# Altium PCB Floyd-V2-PCB.PcbDoc
Units mil, origin at the board's own origin, x right, y up, seen from the top; angles counter-clockwise.
Board outline 3135 x 1771.65 mil, 2 copper layers (Top Layer, Bottom Layer); 25 components, 16 nets, 76 pads, 58 vias.
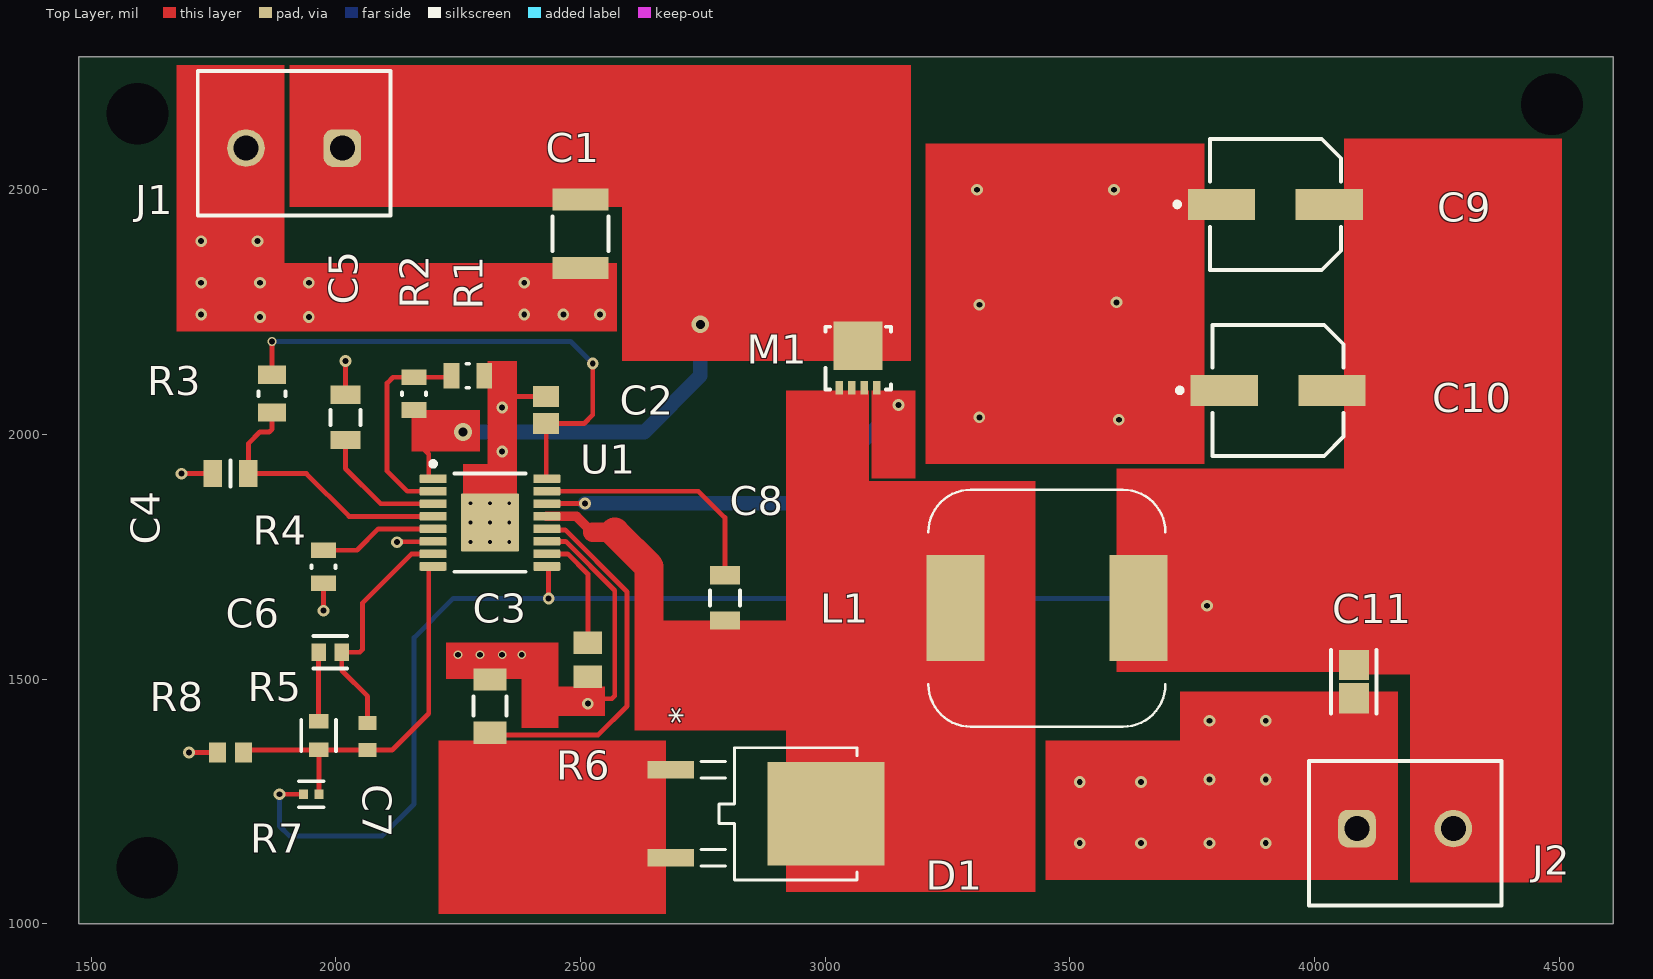
[diagram p0: Top Layer view]
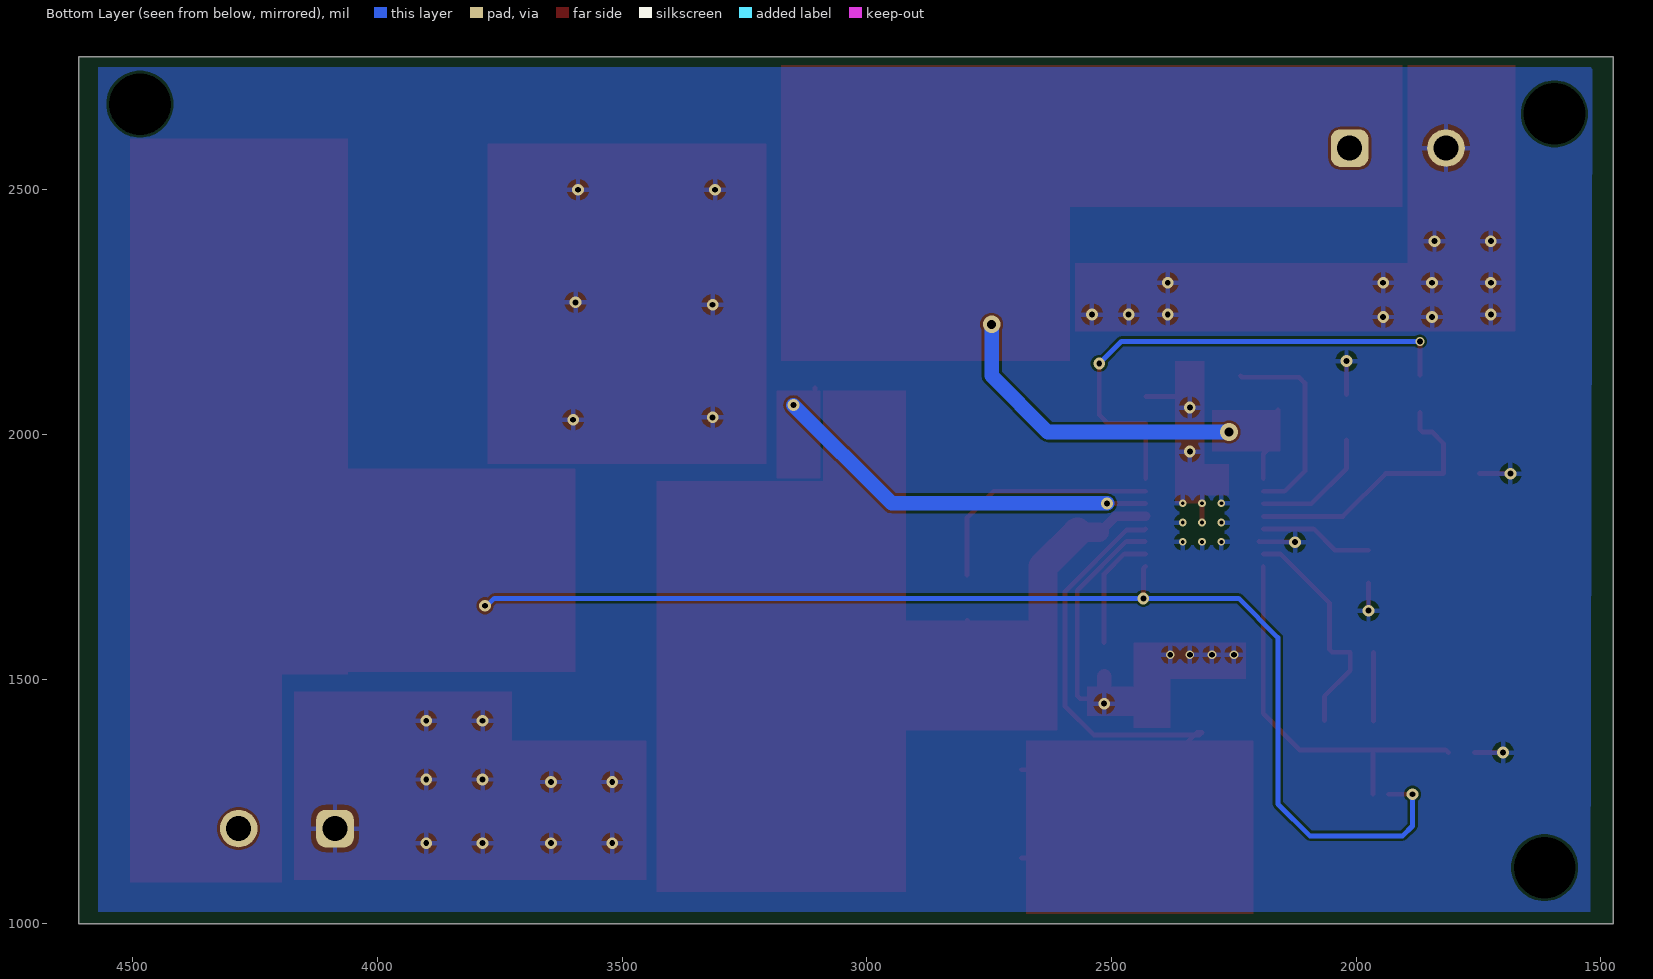
[diagram p1: Bottom Layer view, seen from below]
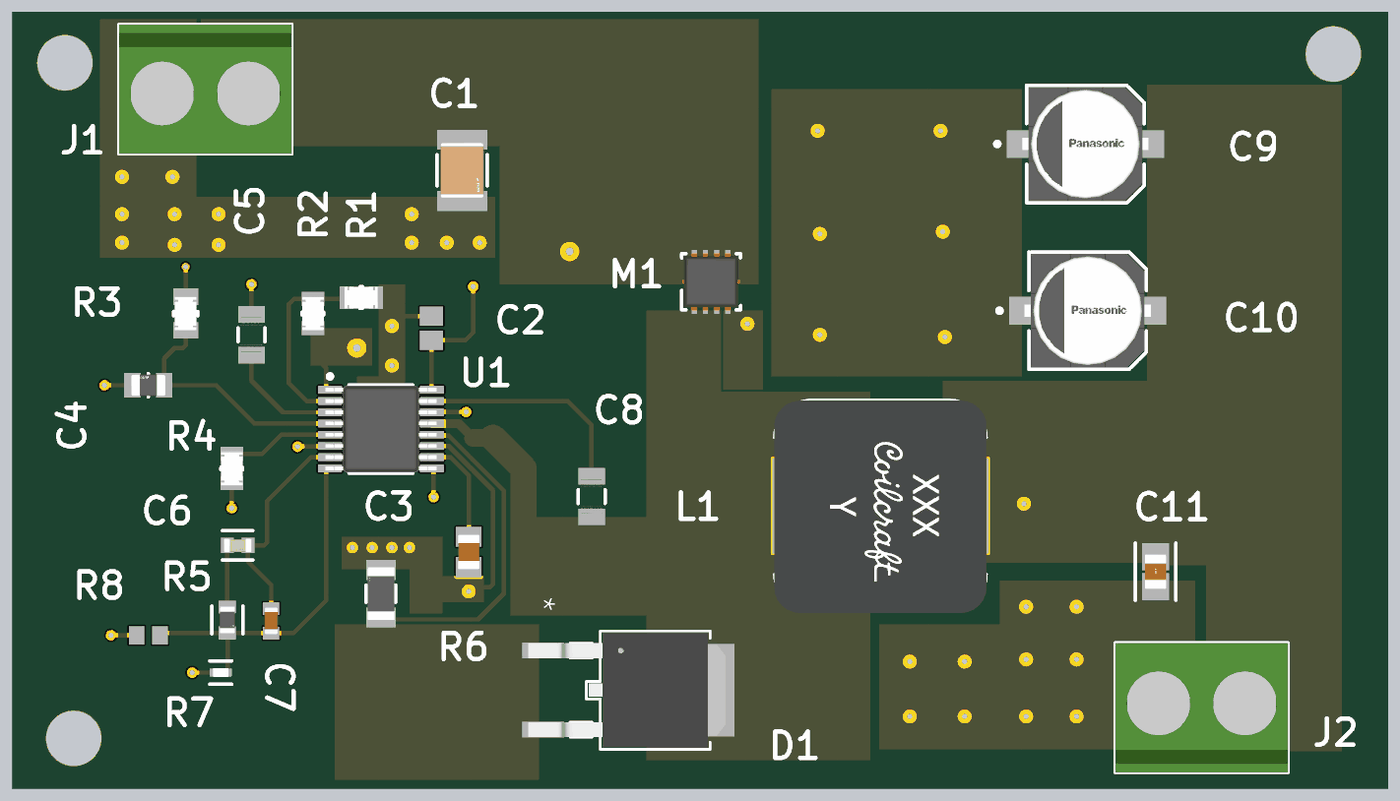
[diagram p2: 3D render of the assembled board from above, using the file's embedded part models]

## Layer stack, top to bottom
Top Solder: solder mask 0.4, Solder Resist, Dk 3.5
Top Layer: signal copper 1.4
Dielectric 1: dielectric 12.6, FR-4, Dk 4.8
Bottom Layer: signal copper 1.4
Bottom Solder: solder mask 0.4, Solder Resist, Dk 3.5

## Board outline
1475,1000 1475,2771.65 4610,2771.65 4610,1000

## Design rules (kind name [scope] priority, off if disabled: settings)
Clearance [All] p1: gap=5 ignorepadtopadclearanceinfootprint=FALSE
HoleSize [All] p1: absolutevalues=TRUE maxlimit=135 minlimit=1 maxpercent=80.000 minpercent=20.000
MinimumSolderMaskSliver [All] p1: minsoldermaskwidth=4
PolygonConnect [All] p1: connectstyle=Relief reliefconductorwidth=10 reliefentries=4 polygonreliefangle="90 Angle" airgapwidth=10
RoutingVias [All] p1: holewidth=28 width=50 viastyle="Through Hole" minholewidth=11.81 minwidth=23.62 maxholewidth=28 maxwidth=50
SilkToSolderMaskClearance [IsPad] p1: minsilkscreentomaskgap=4 clearancetoexposedcopper=TRUE
SolderMaskExpansion [All] p1: expansion=4 istentingtop=FALSE
SupplyNets "Schematic Supply Nets" [InNet('GND')] p1: voltage=0.000
Width [All] p1: maxlimit=200 minlimit=5 preferedwidth=10
27 further rules are at their usual default settings.

## Components (designator, comment, footprint, x,y, rotation, side; value= is the part's Value field where it differs from the comment)
C1 "C3225X7S2A335K200AB" FP-C3225-200-0_4-IPC_A 2500,2410 r270 top
C2 "08053C154KAT2A" CAPC2013X140X50LL20T25 2430,2050 r270 top
C3 "08053C104JAZ2A" CAPC2012X94N 2515,1540 r90 top
C4 "CC0805JRNPO9BN681" FP-CC0805-0_1-0_7-MFG 1785,1920 r180 top
C5 "CGA4C2C0G1H822J060AA" FP-CGA4J-IPC_A 2020,2035 r90 top
C6 "C0603C152K5RACTU" FP-C0603C-CF-MFG 1988.62,1555 r180 top value="1,500 pF"
C7 "CL10C220JB8NNNC" CAPC1608X90N 2065,1382.95 r270 top
C8 "CGA4C2C0G1H822J060AA" FP-CGA4J-IPC_A 2795,1666.26 r270 top
C9 "35SVPF22M" FP-OS-CON-SMT-C6-MFG 3920,2470 r0 top
C10 "35SVPF22M" FP-OS-CON-SMT-C6-MFG 3925.24,2090 r0 top
C11 "C2012X5R1E225K125AC" FP-C2012-125-0_2-IPC_A 4080,1495 r270 top
D1 "SBRD10200TR" DPAK_SBRD10200_6P6X6P1_SDS 2940,1225 r270 top
J1 "691137710002" 691137710002 1915,2595 r180 top
J2 "691137710002" 691137710002 4185,1185 r0 top
L1 "MSS1210-153MEB" IND_MSS1210-153MEB 3452.99,1645 r90 top
M1 "CSD18543Q3A" DNH0008A_NV 3067.2,2156.02 r90 top
R1 "CRCW08052K26FKEA" FP-CRCW0805-e3-IPC_C 2270,2120 r0 top
R2 "CRCW080549K9FKEA" FP-CRCW0805-e3-IPC_C 2160,2083.5 r90 top
R3 "CRCW0805100KFKEA" FP-CRCW0805-e3-MFG 1870,2083.39 r90 top
R4 "CRCW080510K7FKEA" FP-CRCW0805-e3-IPC_C 1975,1730 r270 top
R5 "CRCW060343K2FKEA" FP-CRCW0603-e3-MFG 1965,1385 r270 top
R6 "CSR1206FK12L0" FP-CSR1206-IPC_B 2315,1445 r90 top
R7 "CRCW040224K9FKED" FP-CRCW0402-e3-IPC_C 1950,1265 r0 top
R8 "CRCW06031K69FKEA" RESC1609X50X30ML10T20 1785,1350 r0 top
U1 "LM5088MH-1/NOPB" MXA16A 2315,1820 r0 top

## Footprints (in the part's own frame and the unit in brackets; to place one, negate y for a bottom-side part, rotate by r counter-clockwise, add the part's x,y. Pads: shape width x height; smd on the part's side, far side on the other; paste and mask are expansions set on the pad)
691137710002 [mm] "Horizontal Cable Entry with Pressure Clamp, pitch 5mm, 02p"
  rrect50% 1.95x1.95 hole 1.3: 1(-2.5,0.25)
  round 1.95 hole 1.3: 2(2.5,0.25)
  silkscreen extent -5,-3.75 5,3.75, body extent -5,-3.75 5,3.75, height 11.6
CAPC1608X90N [mm]
  rect 0.73x0.94 smd: 1(-0.71,0) 2(0.71,0)
  body extent -0.8,-0.4 0.8,0.4, height 0.9
CAPC2012X94N [mm]
  rect 1.16x1.47 smd: 1(-0.88,0) 2(0.88,0)
  body extent -1,-0.63 1,0.63, height 0.94
CAPC2013X140X50LL20T25 [mm] "Chip Capacitor, 2-Leads, Body 2.00x1.25mm, IPC High Density"
  rect 1.1x1.35 smd: 1(-0.7,0) 2(0.7,0)
  body extent -1.1,-0.72 1.1,0.72, height 1.4
DNH0008A_NV [mm]
  rect 0.7x0.4 smd paste-0.05 mask-0.051: 1(-1.55,0.975) 2(-1.55,0.325) 3(-1.55,-0.325) 4(-1.55,-0.975) 5(1.55,-0.975) 6(1.55,-0.325) 7(1.55,0.325) 8(1.55,0.975)
  rect 2.51x2.55 smd paste-1.262 mask-1.257: 9(0.645,0)
  silkscreen extent -1.62,-1.7 1.62,1.7, body extent -1.65,-1.66 1.65,1.66, height 0.9
DPAK_SBRD10200_6P6X6P1_SDS [mil]
  rect 36x95 smd paste+0 mask+0: 1(-90,-255.5) 3(90,-255.5)
  rect 211x239 smd paste+0 mask+0: 2(0,61.5)
  silkscreen extent -135,-194 135,125, body extent -130,-289 130,160, height 94
FP-C0603C-CF-MFG [mm]
  rect 0.75x0.9 smd paste+0 mask+0: 1(-0.6,0) 2(0.6,0)
  silkscreen extent -0.87,-0.85 0.88,0.85, body extent -1.2,-0.6 1.2,0.6, height 0.25
FP-C2012-125-0_2-IPC_A [mil]
  rect 62.13x61.27 smd paste+0 mask+0: 1(-34.02,0) 2(34.02,0)
  silkscreen extent -65,-46 65,46, body extent -85,-50 85,50, height 10
FP-C3225-200-0_4-IPC_A [mm]
  rect 1.153x2.904 smd paste+0 mask+0: 1(-1.775,0) 2(1.775,0)
  silkscreen extent -0.9,-1.45 0.9,1.45, body extent -2.85,-1.95 2.85,1.95, height 0.25
FP-CC0805-0_1-0_7-MFG [mm]
  rect 0.95x1.4 smd paste+0 mask+0: 1(-0.925,0) 2(0.925,0)
  silkscreen extent 0,-0.67 0,0.67, body extent -1.6,-1.05 1.6,1.05, height 0.25
FP-CGA4J-IPC_A [mm]
  rect 0.956x1.556 smd paste+0 mask+0: 1(-1.175,0) 2(1.175,0)
  silkscreen extent -0.4,-0.78 0.4,0.78, body extent -2.15,-1.28 2.15,1.28, height 0.25
FP-CRCW0402-e3-IPC_C [mil]
  rect 18.43x18.6 smd paste+0 mask+0: 1(-15.83,0) 2(15.83,0)
  silkscreen extent -25,-27 25,27, body extent -29,-15 29,15, height 10
FP-CRCW0603-e3-MFG [mm]
  rect 0.75x1 smd paste+0 mask+0: 1(-0.75,0) 2(0.75,0)
  silkscreen extent -0.8,-0.9 0.8,0.9, body extent -1.22,-0.6 1.22,0.6, height 0.25
FP-CRCW0805-e3-IPC_C [mil]
  rect 31.75x51.5 smd paste+0 mask+0: 1(-33.5,0) 2(33.5,0)
  silkscreen extent -3,-25 3,25, body extent -53,-31 53,31, height 10
FP-CRCW0805-e3-MFG [mm]
  rect 0.95x1.45 smd paste+0 mask+0: 1(-0.975,0) 2(0.975,0)
  silkscreen extent -0.13,-0.7 0.13,0.7, body extent -1.55,-0.82 1.55,0.82, height 0.25
FP-CSR1206-IPC_B [mil]
  rect 45.5x67.25 smd paste+0 mask+0: 1(-54.18,0) 2(54.18,0)
  silkscreen extent -20,-34 20,34, body extent -87,-43 87,43, height 10
FP-OS-CON-SMT-C6-MFG [mm]
  rect 3.5x1.6 smd paste+0 mask+0: 1(-2.8,0) 2(2.8,0)
  silkscreen extent -5.22,-3.4 3.4,3.4, body extent -4.8,-3.65 4.8,3.65, height 0.25
IND_MSS1210-153MEB [mm]
  rect 5.5x3 smd: 1(0,4.75) 2(0,-4.75)
  silkscreen extent -6.15,-6.15 6.15,6.15, body extent -6.2,-6.15 6.1,6.15, height 10.2
MXA16A [mm] "SOP, 16-Leads, Body 5.1x4.5mm, Pitch 0.65mm, Thermal Pad 3.1x3mm, IPC Medium Density"
  rrect22% 1.4x0.45 smd: 1(-2.95,2.275) 2(-2.95,1.625) 3(-2.95,0.975) 4(-2.95,0.325) 5(-2.95,-0.325) 6(-2.95,-0.975) 7(-2.95,-1.625) 8(-2.95,-2.275) 9(2.95,-2.275) 10(2.95,-1.625) 11(2.95,-0.975) 12(2.95,-0.325) 13(2.95,0.325) 14(2.95,0.975) 15(2.95,1.625) 16(2.95,2.275)
  rrect3% 3x3 smd: 17(0,0)
  silkscreen extent -3.07,-2.55 1.85,3.17, body extent -3.21,-2.5 3.21,2.5, height 1
RESC1609X50X30ML10T20 [mm] "Chip Resistor, 2-Leads, Body 1.55x0.85mm, IPC Low Density"
  rect 0.9x1.05 smd: 1(-0.675,0) 2(0.675,0)
  body extent -0.82,-0.48 0.82,0.48, height 0.5

## Part data
C1: library part CMP-08246-004991-1, "Multilayer Ceramic Capacitors 3.3uF ±10% 100V X7S SMD 1210", Capacitance=3.3uF, Case Code (Imperial)=1210, Case Code (Metric)=3225, Dielectric=X7S, Max Operating Temperature=125°C, Min Operating Temperature=-55°C, Package Quantity=1, Resistor Type=Ceramic, Tolerance=10%, Voltage Rating=100V, Case/Package=1210, Depth=2.5mm, Height=2.5mm, Lead Free="Lead Free", Length=0.126inch, Mount="Surface Mount", Number of Pins=2, Packaging="Tape and Reel", REACH SVHC="No SVHC", RoHS Compliant=Yes, Series=C, Termination=SMD/SMT, Thickness=0.087inch, Voltage Rating (DC)=100V, Weight=0.000564oz, Width=0.098inch
C2: library part CMP-1036-04480-3, Manufacturer="AVX Interconnect / Elco", Part Number=08053C154KAT2A
C3: "0.1 ÂµF Â±5% 25V Ceramic Capacitor X7R 0805 (2012 Metric)", Package="2012 AVX", Check_prices=https://www.snapeda.com/parts/08053C104JAZ2A/AVX/view-part/?ref=eda, MF=AVX, MP=08053C104JAZ2A, SnapEDA_Link=https://www.snapeda.com/parts/08053C104JAZ2A/AVX/view-part/?ref=snap
C4: library part CMP-03422-001404-1, "CAP CER 680PF 50V C0G/NPO 0805", Capacitance=680pF, Case Code (Imperial)=0805, Case Code (Metric)=2012, Dielectric=C0G, Insulation Resistance=100GR, Max Operating Temperature=125°C, Min Operating Temperature=-55°C, Package Quantity=1, Resistor Type=Ceramic, Temperature Coefficient=30ppm/°C, Tolerance=5%, Voltage=50V, Case/Package=0805, Depth=1.25mm, Height=0.6mm, Lead Free="Lead Free", Length=2mm, Material=Ceramic, Mount="Surface Mount", Number of Pins=2, Packaging="Tape and Reel", Radiation Hardening=No, REACH SVHC="No SVHC", RoHS Compliant=Yes, Series=CC, Termination=SMD/SMT, Thickness=0.024inch, Voltage Rating=50V, Voltage Rating (DC)=50V, Width=1.25mm
C5 C8: library part CMP-08246-000542-1, "Cap Ceramic 8.2nF 50V C0G 5% Pad SMD 0805 +125°C Automotive T/R", Capacitance=8.2nF, Case Code (Imperial)=0805, Case Code (Metric)=2012, Dielectric=C0G, Max Operating Temperature=125°C, Min Operating Temperature=-55°C, Package Quantity=1, Ratings=AEC-Q200, Tolerance=5%, Voltage Rating=50V, Case/Package=0805, Composition=Ceramic, Depth=1.25mm, Height=0.6mm, Length=2mm, Mount="Surface Mount", Packaging="Tape and Reel", REACH SVHC="No SVHC", Termination=SMD/SMT, Thickness=0.028inch, Voltage Rating (DC)=50V, Weight=0.000194oz, Width=0.049inch
C6: library part CMP-2006-03093-2, "CAP CER 1500PF 50V X7R 0603", Capacitance="1,500 pF", Manufacturer=KEMET, Package=C0603C-CF, Temperature="-55°C to +125°C", Temperature Characteristic=X7R, Temperature Coefficient=30ppm/°C, Temperature Range High=+125°C, Temperature Range Low=-55°C, Tolerance=0.1, Voltage Rating="50 V", Automotive=Yes, Automotive Grade="Grade 1", Category=Cap, ComponentLink2Description=Datasheet, ComponentLink2URL=https://api.kemet.com/component-edge/download/datasheet/C0603C100J5GACAUTO.pdf, Device Class L1="Passive Components", Device Class L2=Capacitors, Device Class L3="Ceramic Capacitors", Digikey Description="CAP CER 1500PF 50V X7R 0603", Height=0.87mm, Lead Free=Yes, Manufacturer Part Number=C0603C152K5RACTU, Material=Ceramic, Mouser Description="Multilayer Ceramic Capacitors MLCC - SMD/SMT 50volts 1500pF X7R 10%", Octopart=https://octopart.com/c0603c152k5ractu-kemet-137039, RoHS=TRUE
C7: "Samsung Electro-Mechanics CL10C220JB8NNNC 22pF Multilayer Ceramic Capacitor MLCC 50V dc +/-5% Tolerance SMD", Manufacturer_Name=SAMSUNG, Mouser Part Number=187-CL10C220JB8NNNC, Datasheet Link=https://www.arrow.com/en/products/cl10c220jb8nnnc/samsung-electro-mechanics, Geometry.Height=0.9mm, Manufacturer_Part_Number=CL10C220JB8NNNC, Mouser Price/Stock=https://www.mouser.co.uk/ProductDetail/Samsung-Electro-Mechanics/CL10C220JB8NNNC?qs=349EhDEZ59oibjgB6q8fqA%3D%3D
C9 C10: library part CMP-05428-000019-2, "Conductive Polymer Aluminum Solid Capacitors (OS-CON) 22uF ±20% 35V", Capacitance=22uF, Case/Package=Radial, ESR (Equivalent Series Resistance)=35mR, Leakage Current=154uA, Max Operating Temperature=105°C, Min Operating Temperature=-55°C, Package Quantity=1000, Ripple Current=2.6A, Tolerance=20%, Voltage=35V, Diameter=6.3mm, Dissipation Factor=12%, Height=5.9mm, Height - Seated (Max)=0.236inch, Length=5.9mm, Life (Hours)=5000Hour, Mount="Surface Mount", Number of Pins=6, Packaging="Tape and Reel", Polarity=Polar, REACH SVHC="No SVHC", Ripple Current (AC)=2.6A, RoHS Compliant=Yes, Series="OS-CON™, SVPF", Termination=SMD/SMT, Voltage Rating=35V, Voltage Rating (DC)=35V
C11: library part CMP-08246-006459-1, "Multilayer Ceramic Capacitors 2.2μF ±10% 25V X5R SMD 0805", Capacitance=2.2uF, Case Code (Imperial)=0805, Case Code (Metric)=2012, Dielectric=X5R, Dielectric Material=Ceramic, Max Operating Temperature=85°C, Min Operating Temperature=-55°C, Package Quantity=1, Tolerance=10%, Voltage Rating=25V, Case/Package=0805, Construction=Flat, Depth=1.25mm, Height=1.25mm, Lead Free="Lead Free", Length=2mm, Mount="Surface Mount", Number of Pins=2, Packaging="Tape and Reel", REACH SVHC="No SVHC", Resistor Type=Ceramic, RoHS Compliant=Yes, Series=C, Termination=SMD/SMT, Thickness=0.057inch, Voltage Rating (DC)=25V, Weight=0.000194oz, Width=0.049inch
D1: "Description", Manufacturer_Name="SMC Diode Solutions", Copyright="Copyright (C) 2025 Ultra Librarian. All rights reserved.", Manufacturer_Part_Number=SBRD10200TR, RefDes=RefDes, Type=Type
J1 J2: "WR-TBL Series 1377 Horizontal Entry, THT, pitch 5mm, 02p", Manufacturer="Wurth Elektronik", Max Operating Temperature=120°C, Min Operating Temperature=-30°C, Rated Current=16A, Working Voltage=300V, Application="Pressure Clamp", Category="Terminal Block", ComponentLink1Description="Website Link", ComponentLink1URL=https://www.we-online.com/redexpert/article/691137710002?ad, ComponentLink2Description="Datasheet Link", ComponentLink2URL=https://www.we-online.com/redexpert/spec/691137710002?ad, Manufacturer Part Number=691137710002, Match Code=WR-TBL, Modularity=No, Mount="Through Hole", Number of Pins=2, Number of Rows=1, Orientation=Horizontal, Packaging=Box, Pitch=5mm, System="Wire Protector"
L1: "Power inductor, shielded, 10/20% tol, SMT, RoHS", Package=None, Availability=Unavailable, MF=Coilcraft, MP=MSS1210-153MEB, Price=None, SnapEDA_Link=https://www.snapeda.com/parts/MSS1210-153MEB/Coilcraft/view-part/681728/?ref=snap
M1: "60-V, N channel NexFETâ„¢ power MOSFET, single SON 3 mm x 3 mm, 9.9 mOhm 8-VSONP -55 to 150", Manufacturer_Name="Texas Instruments", VALUE_2=Value, Copyright="Copyright (C) 2026 Ultra Librarian. All rights reserved.", Manufacturer_Part_Number=CSD18543Q3A, RefDes=RefDes, Type=TYPE
R1: library part CMP-2001-03765-2, "RES Thick Film, 2.26kΩ, 1%, 0.125W, 100ppm/°C, 0805", Case Code (Imperial)=0805, Case Code (Metric)=2012, Max Operating Temperature=155°C, Max Power Dissipation=125mW, Min Operating Temperature=-55°C, Package Quantity=10, Resistance=2.26kR, Temperature Coefficient=100ppm/°C, Tolerance=1%, Voltage Rating=150V, Case/Package=0805, Composition="Thick Film", Contact Plating=Tin, Depth=1.25mm, Features="Automotive AEC-Q200", Height=0.02inch, Lead Free="Lead Free", Length=2mm, Military Standard=Not, Number of Terminations=2, Packaging="Tape and Reel", Power Rating=125mW, Radiation Hardening=No, Termination=Solder, Voltage Rating (DC)=150V, Weight=0.000194oz, Width=0.049inch
R2: library part CMP-2001-03952-2, "RES Thick Film, 49.9kΩ, 1%, 0.125W, 100ppm/°C, 0805", Case Code (Imperial)=0805, Case Code (Metric)=2012, Max Operating Temperature=155°C, Max Power Dissipation=125mW, Min Operating Temperature=-55°C, Package Quantity=10, Resistance=49.9kR, Temperature Coefficient=100ppm/°C, Tolerance=1%, Voltage Rating=150V, Case/Package=0805, Composition="Thick Film", Contact Plating=Tin, Depth=1.25mm, Features="Automotive AEC-Q200", Height=0.45mm, Lead Free="Lead Free", Length=2mm, Military Standard=Not, Mount="Surface Mount", Number of Terminations=2, Packaging="Tape and Reel", Power Rating=125mW, Radiation Hardening=No, Termination=SMD/SMT, Voltage Rating (DC)=150V, Weight=0.000194oz, Width=0.049inch
R3: library part CMP-2001-04899-2, "RES Thick Film, 100kΩ, 1%, 0.125W, 100ppm/°C, 0805", Case Code (Imperial)=0805, Case Code (Metric)=2012, Max Operating Temperature=155°C, Min Operating Temperature=-55°C, Package Quantity=5000, Power Rating=125mW, Resistance=100kR, Temperature Coefficient=100ppm/°C, Tolerance=1%, Voltage Rating=150V, Case/Package=0805, Composition="Thick Film", Contact Plating=Tin, Depth=1.25mm, Height=0.45mm, Lead Free="Lead Free", Length=2mm, Military Standard=Not, Mount="Surface Mount", Number of Pins=2, Packaging="Tape and Reel", Radiation Hardening=No, Termination=SMD/SMT, Voltage Rating (DC)=150V, Weight=0.000194oz, Width=1.25mm
R4: library part CMP-2001-04284-2, "RES Thick Film, 10.7kΩ, 1%, 0.125W, 100ppm/°C, 0805", Case Code (Imperial)=0805, Case Code (Metric)=2012, Max Operating Temperature=155°C, Max Power Dissipation=125mW, Min Operating Temperature=-55°C, Package Quantity=10, Resistance=10.7kR, Temperature Coefficient=100ppm/°C, Tolerance=1%, Voltage Rating=150V, Case/Package=0805, Composition="Thick Film", Contact Plating=Tin, Depth=1.25mm, Features="Automotive AEC-Q200", Height=0.02inch, Lead Free="Lead Free", Length=2mm, Military Standard=Not, Number of Pins=2, Number of Terminations=2, Packaging="Tape and Reel", Power Rating=125mW, Radiation Hardening=No, Termination=SMD/SMT, Voltage Rating (DC)=150V, Weight=0.000194oz, Width=1.25mm
R5: library part CMP-1012-00695-3, "RES Thick Film, 43.2kΩ, 1%, 0.1W, 100ppm/°C, 0603", Case Code (Imperial)=0603, Case Code (Metric)=1608, Max Operating Temperature=155°C, Max Power Dissipation=100mW, Min Operating Temperature=-55°C, Package Quantity=10, Resistance=43.2kR, Temperature Coefficient=100ppm/°C, Tolerance=1%, Voltage Rating=75V, Case/Package=0603, Composition="Thick Film", Contact Plating=Tin, Depth=0.85mm, Features="Automotive AEC-Q200", Height=0.45mm, Lead Free="Lead Free", Length=1.55mm, Military Standard=Not, Number of Pins=2, Number of Terminations=2, Packaging="Tape and Reel", Power Rating=100mW, Radiation Hardening=No, Termination=SMD/SMT, Voltage Rating (DC)=75V, Weight=7.1E-05oz, Width=0.033inch
R6: library part CMP-26527-002803-1, "General Purpose Thick Film Chip Resistor, 1206, 12mΩ, 1%, 0.5W", Case Code (Imperial)=1206, Case Code (Metric)=3216, Max Operating Temperature=155°C, Max Power Dissipation=500mW, Min Operating Temperature=-55°C, Resistance=12mR, Resistor Type="Thick Film", Temperature Coefficient=100ppm/°C, Tolerance=1%, Case/Package=1206, Construction=Rectangular, Contact Plating=Tin, Depth=1.55mm, Height=0.026inch, Lead Free="Lead Free", Length=0.12inch, Military Standard=Not, Mount="Surface Mount", Number of Terminations=2, Packaging="Tape and Reel", RoHS Compliant=Yes, Series=CSR, Width=0.061inch
R7: library part CMP-2002-08407-2, "RES Thick Film, 24.9kΩ, 1%, 0.063W, 100ppm/°C, 0402", Case Code (Imperial)=0402, Case Code (Metric)=1005, Max Operating Temperature=155°C, Max Power Dissipation=63mW, Min Operating Temperature=-55°C, Package Quantity=10, Resistance=24.9kR, Temperature Coefficient=100ppm/°C, Tolerance=1%, Voltage Rating=50V, Case/Package=0402, Composition="Thick Film", Contact Plating=Tin, Depth=0.5mm, Features="Automotive AEC-Q200", Height=0.35mm, Lead Free="Lead Free", Length=1mm, Military Standard=Not, Mount="Surface Mount", Number of Pins=2, Number of Terminations=2, Packaging="Tape and Reel", Power Rating=63mW, Radiation Hardening=No, Termination=SMD/SMT, Voltage Rating (DC)=50V, Weight=2.3E-05oz, Width=0.5mm
R8: library part CMP-2000-03004-1, Manufacturer="Vishay Dale", Part Number=CRCW06031K69FKEA
U1: library part PM-SWREG-LM5088-1-17, "Wide Input Range Non-Synchronous Buck Controller, 16-pin TSSOP-EP, Pb-Free", Manufacturer="Texas Instruments", PackageTopMarking=NSUZXYTT*LM5088*MH-1, PowerWise=Y, Code_JEDEC=MO-153-ABT, ComponentLink1Description="Datasheet URL", ComponentLink1URL=http://www.ti.com/general/docs/lit/getliterature.tsp?genericPartNumber=LM5088&fileType=pdf, CompType=Switcher, PackageDescription="Molded TSSOP, Jedec, Exposed Pad, 5.0 x 4.4 x 0.9mm Body,16 Lead, 0.65mm Pitch", PackageReference=PWP0016A, PinCount=16, RoHS=Y

## Free pads (board coordinates)
  round 60 hole 125.98: 2(4485,2675) 3(1595,2655) 4(1615,1115)

## Via types
v1: diameter 24, hole 12, Top Layer to Bottom Layer, 42 vias
v2: diameter 15.75, hole 7.87, Top Layer to Bottom Layer, 9 vias
v3: diameter 18, hole 12, Top Layer to Bottom Layer, 5 vias
v4: diameter 36, hole 18, Top Layer to Bottom Layer, 2 vias

## Nets (pads, with @x,y where several pads share a name; then routed paths per layer and width w, separated by ;. In a path a pad name is that pad's centre, name@x,y a point inside that pad or via, vN(x,y) a via of type N, cw(c..) or ccw(c..) an arc to the next point about the centre after c; other vN are vias at no path point)
BOOT: C8.1 U1.15 | length 504.8
  Top Layer w10: U1.15@2430.08,1883.98 2741.02,1883.98 2795,1830 C8.1
COMP: C6.1 C7.1 U1.7 | length 477.6
  Top Layer w10: C7.1@2065,1415.91 2065,1465 2012.24,1517.76 C6.1 2049.14,1555 2055,1560.86 2055,1655.94 2155.09,1756.02 U1.7@2189.92,1756.02
CS: D1.1 D1.3 R6.1 U1.12 | length 1598.2
  Top Layer w10: 2320,1315 2401.69,1315 ; U1.12@2430.08,1807.2 2432.07,1805.21 2468.51,1805.21 2595,1678.72 2595,1445 2536.11,1386.11 2325.88,1386.11 2319.7,1386.11 R6.1 2319.7,1390.82 2325.88,1390.82 2401.69,1315 ; D1.3 2581.69,1135 2401.69,1315 ; D1.1 2401.69,1315
DITH: C3.2 U1.10 | length 242.3
  Top Layer w10: U1.10@2430.08,1756.02 2473.98,1756.02 2515,1715 C3.2
EN: R1.1 R2.2 U1.2 | length 419.6
  Top Layer w10: U1.2@2189.92,1883.98 2146.02,1883.98 2105,1925 2105,2105 2117,2117 R2.2 2233.5,2117 R1.1
FB: C7.2 R5.2 R7.2 R8.2 U1.8 | length 803.2
  Top Layer w10: R8.2 1817.05,1355.47 R5.2 ; R7.2 1965.83,1354.64 R5.2 ; U1.8@2189.92,1730.43 2189.92,1429.92 2115,1355 C7.2 2064.76,1355.24 1965.24,1355.24 R5.2
GND: C1.2 C2.1 C3.1 C4.2 C5.2 C9.1 C10.1 C11.2 J1.2 J2.1 R1.2 R4.2 R6.2 R8.1 U1.6 U1.11 U1.17 | length 976.6
  Top Layer w10: v1(1685,1920) C4.2 ; v1(1700,1350) R8.1 ; v1(1975,1640) R4.2 ; C5.2 v1(2020,2150) ; v1(2125,1780) 2125.81,1780.81 2198.05,1780.81 U1.6 ; v2(2315,1820) v2(2315,1859.37) ; v1(2340,2055) 2362.56,2077.56 C2.1 ; U1.11 2469.6,1781.61 2570,1681.21 2570,1465.86 2564.14,1460 2525,1460 v1(2515,1450)
  Top Layer w30: v1(2515,1450) 2510.88,1454.12 2515,1458.23 C3.1
  other v1: 3520,1165 3645,1165 3785,1165 3900,1165 3520,1290 3645,1290 3785,1295 3900,1295 3785,1415 3900,1415 2340,1965 3600,2030 3315,2035 1845,2240 1945,2240 1725,2245 2385,2245 2465,2245 2540,2245 3315,2265 3595,2270 1725,2310 1845,2310 1945,2310 2385,2310 1725,2395 1840,2395 3310,2500 3590,2500
  other v2: 2275.63,1780.63 2315,1780.63 2354.37,1780.63 2275.63,1820 2354.37,1820 2275.63,1859.37 2354.37,1859.37
  other v3: 2250,1550 2295,1550 2340,1550 2380,1550
HG: M1.4 U1.14 | length 880.3
  Top Layer w10: U1.14@2430.08,1858.39 2430.89,1859.19 v1(2509.19,1859.19) ; M1.4 3105.59,2064.41 3110,2060 v1(3150,2060)
  Bottom Layer w30: v1(2509.19,1859.19) 2949.19,1859.19 v1(3150,2060)
NetC6_2: C6.2 R5.1 | length 140.5
  Top Layer w10: R5.1 C6.2
OUT: C9.2 C10.2 C11.1 J2.2 L1.2 R7.1 U1.9 | length 2491.8
  Top Layer w10: v1(1885,1265) R7.1 ; U1.9@2430.08,1730.43 U1.9 2435,1726.57 v1(2435,1665)
  Bottom Layer w10: v1(1885,1265) 1885,1200 1905,1180 2095,1180 2160,1245 2160,1585 2240,1665 v1(2435,1665) 3761.21,1665 3776.21,1650 v1(3780,1650)
RAMP: C4.1 R3.1 U1.4 | length 561
  Top Layer w10: R3.1 1870,2010.86 1864.14,2005 1845,2005 1821.42,1981.42 C4.1 1940,1920 2027.2,1832.8 U1.4@2189.92,1832.8
RT/SYNC: R4.1 U1.5 | length 233
  Top Layer w10: R4.1 2043.5,1763.5 2087.2,1807.2 U1.5@2189.92,1807.2
SS: C5.1 U1.3 | length 258.3
  Top Layer w10: C5.1 2020,1930 2091.61,1858.39 U1.3@2189.92,1858.39
SW: C8.2 D1.2 L1.1 M1.1 M1.2 M1.3 U1.13 | length 567.7
  Top Layer w10: 2640,1605 2675,1570 2711.18,1606.18 2781.18,1606.18 C8.2
  Top Layer w20: U1.13@2430.08,1832.8 2492.2,1832.8 2525,1800
  Top Layer w40: 2525,1800 2570,1800
  Top Layer w60: 2570,1800 2640,1730 2640,1605
VCC: C2.2 R3.2 U1.16 | length 1062
  Top Layer w10: R3.2 v3(1870,2190) ; U1.16@2430.08,1909.57 2430.08,2022.36 C2.2 2507.44,2022.44 2525,2040 v1(2525,2145)
  Bottom Layer w10: v3(1870,2190) 2480,2190 v1(2525,2145)
Vin: C1.1 J1.1 M1.5 M1.6 M1.7 M1.8 M1.9 R2.1 U1.1 | length 790.5
  Top Layer w10: R2.1 2160,1990 2189.92,1960.08 U1.1@2189.92,1909.57
  Bottom Layer w30: v4(2260,2005) 2630,2005 2745,2120 v4(2745,2225)

## Polygon pours and split planes (outlines as drawn)
GND on Bottom Layer "GND_L02_P000" (solid, pour order 0): 1517.39,2750 4570,2750 4570,1025 1522.39,1025

## Other copper
Top Layer:
  rectangle net OUT: 4195,1085 4505,1550
  rectangle net OUT: 3595,1515 4070,1930
  rectangle net OUT: 4060,1510 4505,2605
  rectangle net Vin: 2585,2150 3175,2755
  rectangle net Vin: 1905,2465 2600,2755
  rectangle net SW: 2610,1395 2735,1620
  rectangle net GND: 1675,2335 1895,2755
  rectangle net GND: 1675,2210 2575,2350
  rectangle net GND: 3205,1940 3775,2595
  rectangle net GND: 3725,1090 4170,1475
  rectangle net GND: 3450,1090 3745,1375
  rectangle net GND: 2445,1425 2550,1485
  rectangle net GND: 2310,1859.37 2370,2150
  rectangle net GND: 2260,1875 2315,1940
  rectangle net GND: 2225,1500 2455,1575
  rectangle net GND: 2380,1400 2455,1510
  rectangle net CS: 2210,1020 2675,1375
  rectangle net HG: 3095,1910 3185,2090
  rectangle net SW: 2920,1830 3090,2090
  rectangle net SW: 2920,1065 3430,1905
  rectangle net SW: 2730,1395 3110,1620
  rectangle net Vin: 2155,1965 2295,2050

## Silkscreen, mask and mechanical layers (free items; w line width, h text height)
Mechanical 1:
  the board outline again, w10

## Text inside footprints (layer, text, board x,y; h text height)
D1: Top Overlay "*" at 2659.5,1442.5 h50 r270; Top 3D Body "*" at 2805,1327.5 h50 r270